# Altium PCB PCB_new.PcbDoc (part 1 of 2)
Units mm, origin at the board's own origin, x right, y up, seen from the top; angles counter-clockwise.
Board outline 65.13 x 92.71 mm, 2 copper layers (Top Layer, Bottom Layer); 63 components, 54 nets, 264 pads, 73 vias.
Unrouted connection lines stored in the file: 34.
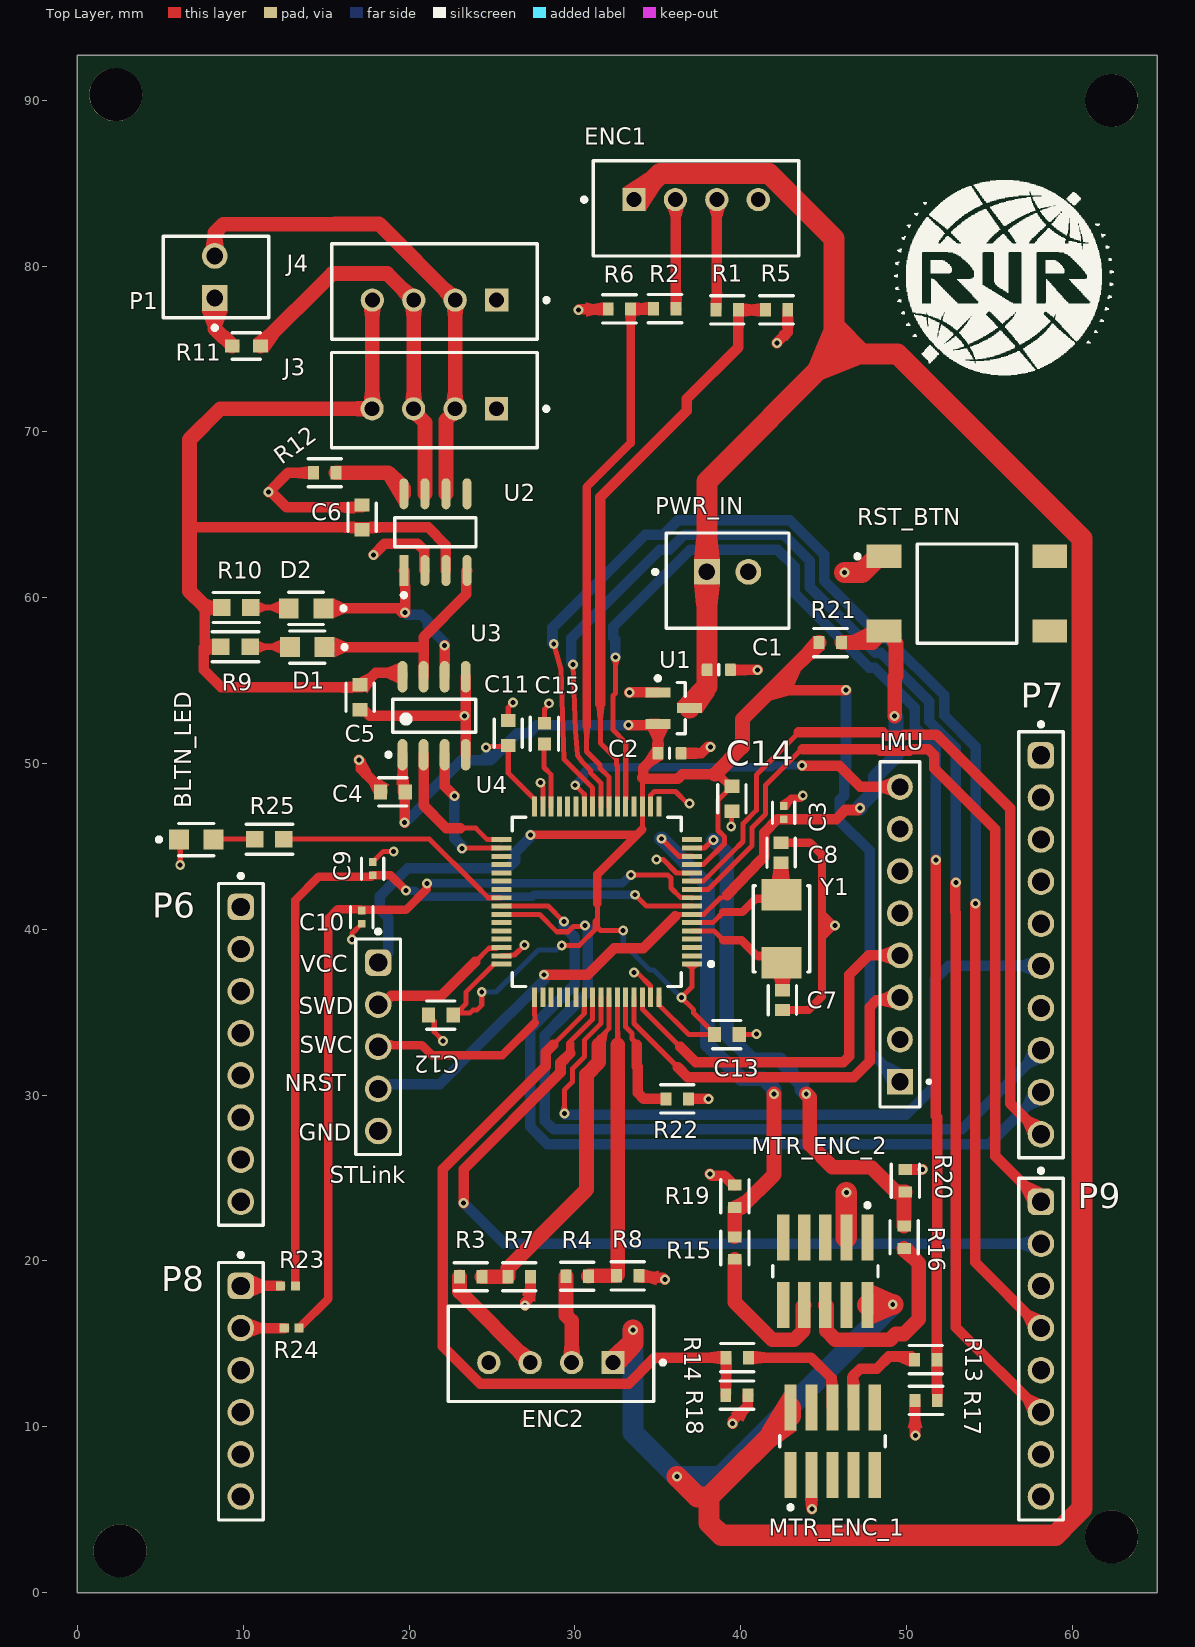
[diagram p0: Top Layer view]
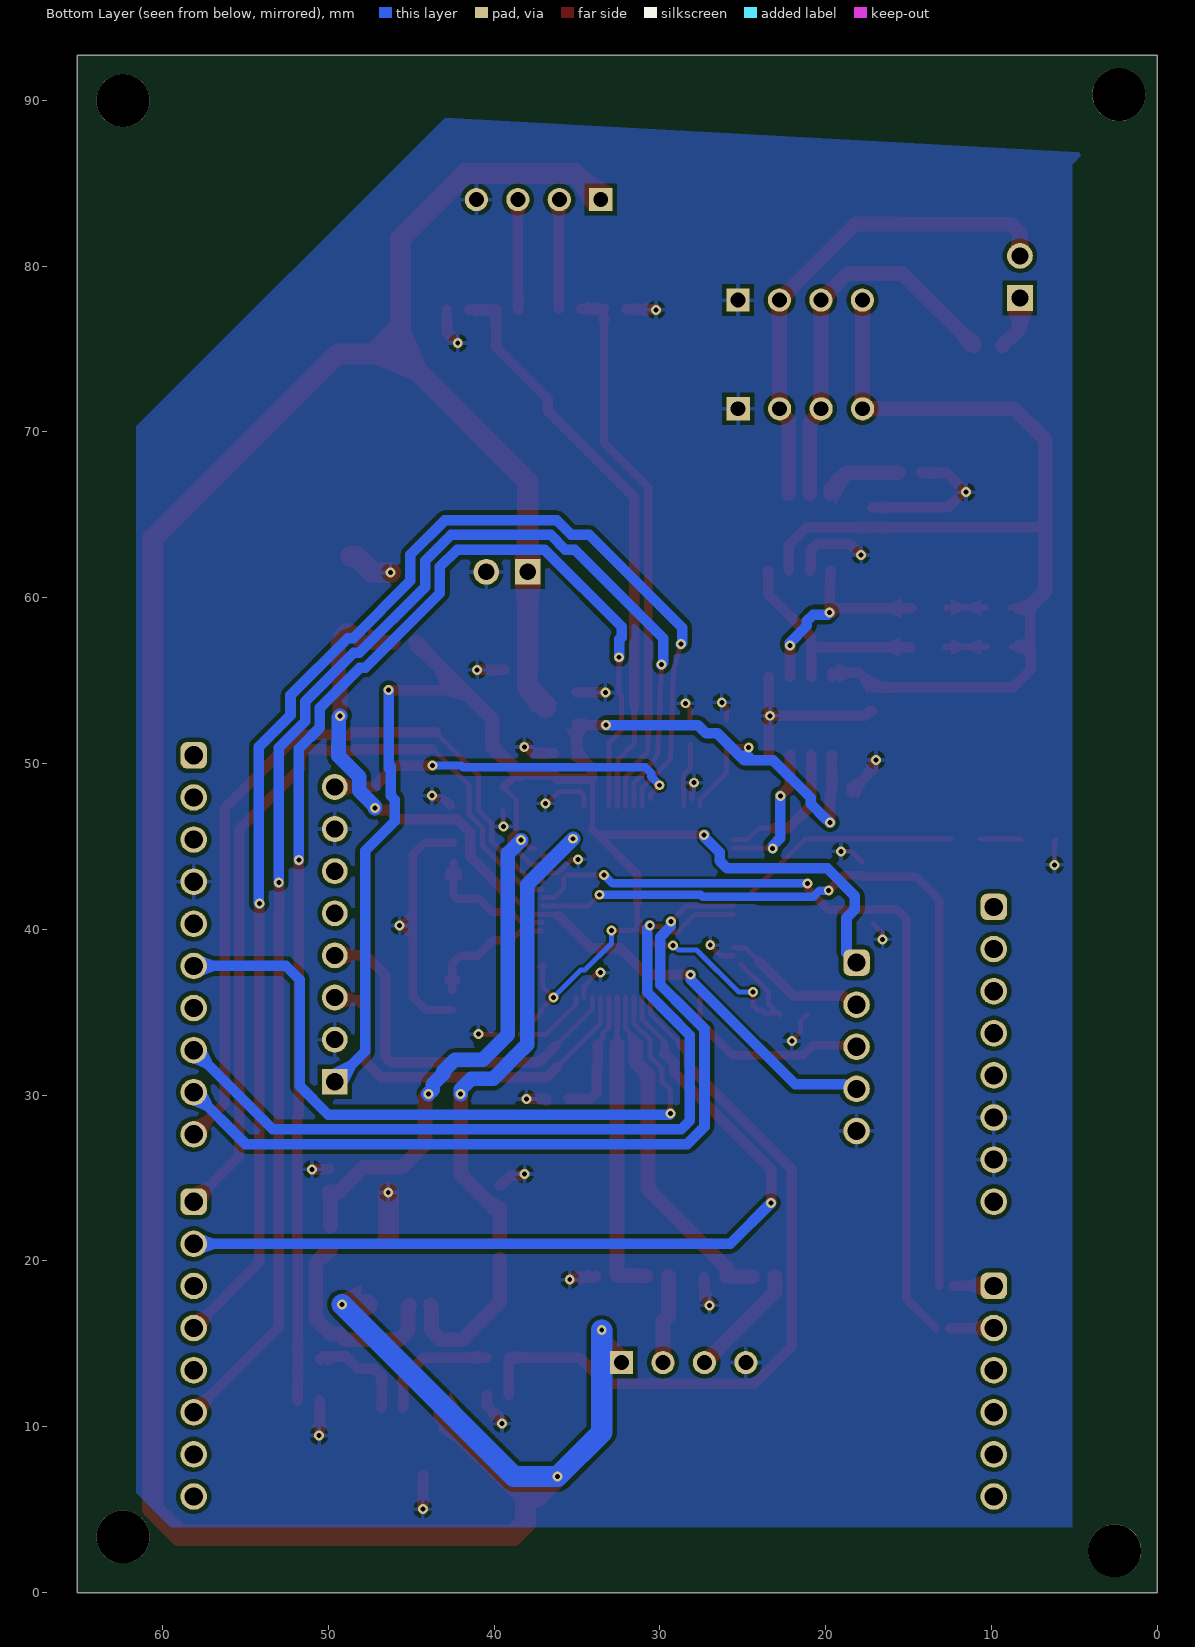
[diagram p1: Bottom Layer view, seen from below]
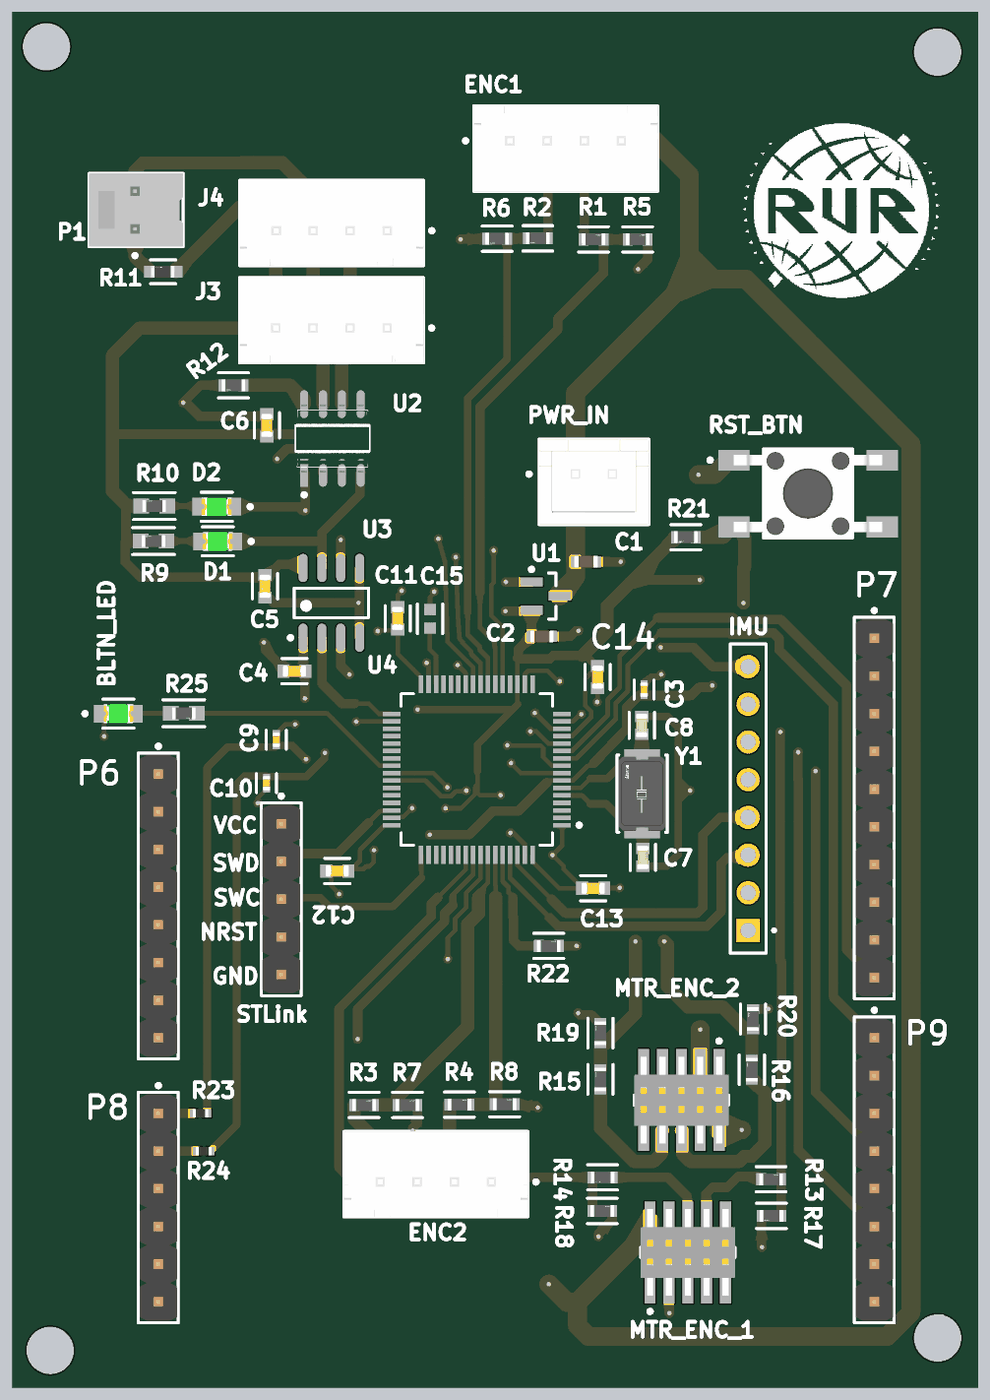
[diagram p2: 3D render of the assembled board from above, using the file's embedded part models]

## Layer stack, top to bottom
Top Solder: solder mask 0.0102, Solder Resist, Dk 3.5
Top Layer: signal copper 0.0356
Dielectric 1: dielectric 0.32, FR-4, Dk 4.8
Bottom Layer: signal copper 0.0356
Bottom Solder: solder mask 0.0102, Solder Resist, Dk 3.5

## Board outline
0,0 65.126,0 65.126,92.71 0,92.71

## Design rules (kind name [scope] priority, off if disabled: settings)
Clearance ClearanceChip [All vs WithinRoom('ChipRegion')] p1: gap=0.152 ignorepadtopadclearanceinfootprint=TRUE
Clearance Clearance_1 [All] p2: gap=0.254 ignorepadtopadclearanceinfootprint=TRUE
HoleSize [All] p1: absolutevalues=TRUE maxlimit=25.4 minlimit=0.3 maxpercent=80.000 minpercent=20.000
MinimumSolderMaskSliver [All] p1: minsoldermaskwidth=0.127
PolygonConnect [All] p1: connectstyle=Relief reliefconductorwidth=0.254 reliefentries=4 polygonreliefangle="90 Angle" airgapwidth=0.254
RoomDefinition ChipRegion [False] p1: confinementstyle=ConfineIn formatcopy=TRUE lockcomponents=FALSE outline 23.317,49.936 39.091,49.936 39.091,32.36 23.317,32.36
RoutingVias [All] p1: holewidth=0.3 width=0.5 viastyle="Through Hole" minholewidth=0.3 minwidth=0.6 maxholewidth=1 maxwidth=2
SolderMaskExpansion [All] p1: expansion=0.102 istentingtop=FALSE
SupplyNets "Schematic Supply Nets_7" [InNet('GND')] p1: voltage=0.000
SupplyNets "Schematic Supply Nets_6" [InNet('VCC-3V3')] p2: voltage=0.000
SupplyNets "Schematic Supply Nets_5" [InNet('CAN_TX')] p3: voltage=0.000
SupplyNets "Schematic Supply Nets_4" [InNet('CAN-3V3')] p4: voltage=0.000
SupplyNets "Schematic Supply Nets_3" [InNet('VCC-5V')] p5: voltage=0.000
SupplyNets "Schematic Supply Nets_2" [InNet('OSC2')] p6: voltage=0.000
SupplyNets "Schematic Supply Nets_1" [InNet('CAN_RX')] p7: voltage=0.000
SupplyNets "Schematic Supply Nets" [InNet('OSC1')] p8: voltage=0.000
Width [All] p1: maxlimit=2.54 minlimit=0.254 preferedwidth=0.508
28 further rules are at their usual default settings.

## Classes and differential pairs
component class VoltageRegulator_3v3: C1 C2 U1
component class STM32: BLTN_LED C3 C11 C12 C13 C14 C15 R21 R22 R25 RST_BTN U4
component class STLink: STLink
component class Power: PWR_IN
component class Oscilator: C7 C8 Y1
component class OdomEncoders: ENC1 ENC2 R1 R2 R3 R4 R5 R6 R7 R8
component class MotorShield: C9 C10 P6 P7 P8 P9 R23 R24
component class MotorEncoders: MTR_ENC_1 MTR_ENC_2 R13 R14 R15 R16 R17 R18 R19 R20
component class IMU: IMU
component class Communication: C4 C5 C6 D1 D2 J3 J4 P1 R9 R10 R11 R12 U2 U3

## Components (designator, comment, footprint, x,y, rotation, side; value= is the part's Value field where it differs from the comment)
BLTN_LED "APHCM2012CGCK-F01" FP-APHCM2012CGCK-F01-MFG 7.163,45.415 r0 top
C1 "Capacitor 1µF +/-40% 50V 0603" CAPC0603(1608)100_L 38.684,55.651 r0 top value=1µF
C2 "Capacitor 1µF +/-40% 50V 0603" CAPC0603(1608)100_L 35.712,50.622 r0 top value=1µF
C3 "100nF" FP-0402B104K160CT-IPC_C 42.596,47.041 r90 top
C4 "CC0603KRX7R9BB104" FP-CC0603-DA-MFG 19.025,48.285 r180 top value="100 nF"
C5 "CC0603KRX7R9BB104" FP-CC0603-DA-MFG 17.043,54 r270 top value="100 nF"
C6 "CC0603KRX7R9BB104" FP-CC0603-DA-MFG 17.17,64.846 r90 top value="100 nF"
C7 "C0603C270K5GAC" FP-C0603C-CF-MFG 42.52,35.738 r270 top value="27 pF"
C8 "C0603C270K5GAC" FP-C0603C-CF-MFG 42.443,44.628 r90 top value="27 pF"
C9 "100nF" FP-0402B104K160CT-IPC_C 17.805,43.663 r270 top
C10 "100nF" FP-0402B104K160CT-IPC_C 17.145,40.738 r270 top
C11 "CC0603KRX7R9BB104" FP-CC0603-DA-MFG 25.984,51.841 r270 top value="100 nF"
C12 "CC0603KRX7R9BB104" FP-CC0603-DA-MFG 21.92,34.823 r180 top value="100 nF"
C13 "CC0603KRX7R9BB104" FP-CC0603-DA-MFG 39.167,33.655 r180 top value="100 nF"
C14 "CC0603KRX7R9BB104" FP-CC0603-DA-MFG 39.472,47.879 r270 top value="100 nF"
C15 "CL10A475KP8NNNC" FP-CL10-IPC_C 28.169,51.808 r90 top
D1 "APHCM2012CGCK-F01" FP-APHCM2012CGCK-F01-MFG 13.86,57.023 r180 top
D2 "APHCM2012CGCK-F01" FP-APHCM2012CGCK-F01-MFG 13.792,59.36 r180 top
ENC1 "B4B-XH-A(LF)(SN)" FP-B4B-XH-A_LF_SN-MFG 37.313,83.49 r180 top
ENC2 "B4B-XH-A(LF)(SN)" FP-B4B-XH-A_LF_SN-MFG 28.559,14.393 r0 top
IMU "SSW-108-XX-X-S" SAMTEC_SSW-108-XX-X-S 49.606,30.81 r90 top
J3 "B4B-XH-A(LF)(SN)" FP-B4B-XH-A_LF_SN-MFG 21.523,71.924 r0 top
J4 "B4B-XH-A(LF)(SN)" FP-B4B-XH-A_LF_SN-MFG 21.534,78.478 r0 top
MTR_ENC_1 "FTSH-105-01-L-DV" SMTC-FTSH-105-01-L-DV_V 45.542,9.119 r0 top
MTR_ENC_2 "FTSH-105-01-L-DV" SMTC-FTSH-105-01-L-DV_V 45.11,19.38 r180 top
P1 "22-23-2021" MOLX-22-23-2021_V 8.28,79.35 r90 top
P6 "61300811121" 61300811121 9.855,32.461 r270 top
P7 "61301011121" 61301011121 58.115,39.065 r270 top locked
P8 "61300611121" 61300611121 9.855,12.141 r270 top locked
P9 "61300811121" 61300811121 58.115,14.681 r270 top locked
PWR_IN "B2B-XH-A(LF)(SN)" FP-B2B-XH-A_LF_SN-MFG 39.218,61.036 r0 top
R1 "10K" FP-RC0603-0_55-IPC_C 39.192,77.368 r0 top
R2 "10K" FP-RC0603-0_55-IPC_C 35.433,77.445 r180 top
R3 "10K" FP-RC0603-0_55-IPC_C 23.724,19.05 r0 top
R4 "10K" FP-RC0603-0_55-IPC_C 30.15,19.075 r0 top
R5 "20K" FP-RC0603-0_55-IPC_C 42.164,77.368 r0 top
R6 "20K" FP-RC0603-0_55-IPC_C 32.69,77.419 r180 top
R7 "20K" FP-RC0603-0_55-IPC_C 26.645,19.05 r0 top
R8 "20K" FP-RC0603-0_55-IPC_C 33.198,19.101 r0 top
R9 "AC0603FR-10470RL" FP-AC0603-IPC_A 9.531,57.048 r180 top
R10 "AC0603FR-10470RL" FP-AC0603-IPC_A 9.576,59.411 r180 top
R11 "RT0603FRE07120RL" FP-RT0603-MFG 10.185,75.184 r180 top value=120Ω
R12 "10K" FP-RC0603-0_55-IPC_C 14.919,67.539 r180 top
R13 "10K" FP-RC0603-0_55-IPC_C 51.156,14.046 r0 top
R14 "10K" FP-RC0603-0_55-IPC_C 39.802,14.173 r180 top
R15 "10K" FP-RC0603-0_55-IPC_C 39.649,20.777 r90 top
R16 "10K" FP-RC0603-0_55-IPC_C 49.86,21.429 r90 top
R17 "20K" FP-RC0603-0_55-IPC_C 51.181,11.582 r180 top
R18 "20K" FP-RC0603-0_55-IPC_C 39.776,11.913 r0 top
R19 "20K" FP-RC0603-0_55-IPC_C 39.649,23.892 r90 top
R20 "20K" FP-RC0603-0_55-IPC_C 49.936,24.841 r90 top
R21 "10k" FP-RC0603-0_55-IPC_C 45.415,57.302 r180 top
R22 "10k" FP-RC0603-0_55-IPC_C 36.17,29.769 r0 top
R23 "1k" RESC1005X40X25NL05T05 12.693,18.491 r180 top
R24 "1k" RESC1005X40X25NL05T05 12.921,15.951 r180 top
R25 "AC0603FR-10470RL" FP-AC0603-IPC_A 11.569,45.441 r0 top
RST_BTN "1301.9316.24" FP-1301_9316_24-MFG 53.645,60.249 r0 top
STLink "61300511121" 61300511121 18.136,32.918 r270 top
U1 "MCP1700T-3302E/TT" SOT-23-TT3_N 35.956,53.34 r0 top
U2 "SN65HVD230QDR" FP-D0008A-IPC_C 21.59,63.957 r90 top
U3 "ADUM1201BRZ-RL7" ADI-R-8_L 21.514,52.883 r90 top
U4 "STM32F446RET6" FP-LQFP64-5W-MFG 31.318,41.656 r180 top
Y1 "ABM3-8.000MHZ-D2Y-T" FP-ABM3-MFG 42.469,40.03 r90 top

## Footprints (in the part's own frame and the unit in brackets; to place one, negate y for a bottom-side part, rotate by r counter-clockwise, add the part's x,y. Pads: shape width x height; smd on the part's side, far side on the other; paste and mask are expansions set on the pad)
61300511121 [mm] "Pin Header, pitch 2.54 mm, THT, Vertical, single row, 5p"
  rrect50% 1.6x1.6 hole 1.1: 1(-5.08,0)
  round 1.6 hole 1.1: 2(-2.54,0) 3(0,0) 4(2.54,0) 5(5.08,0)
  silkscreen extent -7.07,-1.34 6.5,1.34, body extent -6.35,-1.27 6.35,1.27, height 8.57
61300611121 [mm] "Pin Header, pitch 2.54 mm, THT, Vertical, single row, 6p"
  rrect50% 1.6x1.6 hole 1.1: 1(-6.35,0)
  round 1.6 hole 1.1: 2(-3.81,0) 3(-1.27,0) 4(1.27,0) 5(3.81,0) 6(6.35,0)
  silkscreen extent -8.34,-1.34 7.77,1.34, body extent -7.62,-1.27 7.62,1.27, height 8.57
61300811121 [mm] "Pin Header, pitch 2.54 mm, THT, Vertical, single row, 8p"
  rrect50% 1.6x1.6 hole 1.1: 1(-8.89,0)
  round 1.6 hole 1.1: 2(-6.35,0) 3(-3.81,0) 4(-1.27,0) 5(1.27,0) 6(3.81,0) 7(6.35,0) 8(8.89,0)
  silkscreen extent -10.88,-1.34 10.31,1.34, body extent -10.16,-1.27 10.16,1.27, height 8.57
61301011121 [mm] "Pin Header, pitch 2.54 mm, THT, Vertical, single row, 10p"
  rrect50% 1.6x1.6 hole 1.1: 1(-11.43,0)
  round 1.6 hole 1.1: 2(-8.89,0) 3(-6.35,0) 4(-3.81,0) 5(-1.27,0) 6(1.27,0) 7(3.81,0) 8(6.35,0) 9(8.89,0) 10(11.43,0)
  silkscreen extent -13.42,-1.34 12.85,1.34, body extent -12.7,-1.27 12.7,1.27, height 8.57
ADI-R-8_L [mm] "SOIC, 8-Leads, Body 4.9x3.9mm, Pitch 1.27mm, IPC High Density"
  oval 1.9x0.6 smd: 1(-2.35,1.905) 2(-2.35,0.635) 3(-2.35,-0.635) 4(-2.35,-1.905) 5(2.35,-1.905) 6(2.35,-0.635) 7(2.35,0.635) 8(2.35,1.905)
  silkscreen extent -2.47,-2.5 1,2.88, body extent -2,-2.5 2,2.5, height 1.75
CAPC0603(1608)100_L [mm] "Chip Capacitor, Body 1.6x0.8mm, Height 1.0mm, IPC High Density"
  rrect25% 0.66x0.76 smd: 1(-0.7,0) 2(0.7,0)
  silkscreen extent 0,-0.3 0,0.3, body extent -0.8,-0.4 0.8,0.4, height 0.95
FP-0402B104K160CT-IPC_C [mm]
  rect 0.466x0.472 smd paste+0 mask+0: 1(-0.403,0) 2(0.403,0)
  silkscreen extent -0.64,-0.67 0.64,0.67, body extent -0.74,-0.38 0.74,0.38, height 0.25
FP-1301_9316_24-MFG [mm]
  rect 2.1x1.4 smd paste+0 mask+0: 1(-5,2.25) 2(5,2.25) 3(-5,-2.25) 4(5,-2.25)
  silkscreen extent -6.72,-3 3,3, body extent -6.15,-3.1 6.15,3.1, height 0.25
FP-ABM3-MFG [mm]
  rect 1.9x2.4 smd paste+0 mask+0: 1(-2.05,0) 2(2.05,0)
  silkscreen extent -2.6,-1.7 2.6,1.7, body extent -3.1,-1.8 3.1,1.8, height 0.25
FP-AC0603-IPC_A [mm]
  rect 1.059x1.012 smd paste+0 mask+0: 1(-0.877,0) 2(0.877,0)
  silkscreen extent -1.41,-0.91 1.41,0.91, body extent -1.91,-1.01 1.91,1.01, height 0.25
FP-APHCM2012CGCK-F01-MFG [mm]
  rect 1.2x1.2 smd paste+0 mask+0: 1(-1.05,0) 2(1.05,0)
  silkscreen extent -2.37,-0.97 1.05,0.97, body extent -1.75,-0.77 1.75,0.77, height 0.25
FP-B2B-XH-A_LF_SN-MFG [mm]
  rect 1.55x1.55 hole 1 paste-2539.97 mask+0: 1(-1.25,0.525)
  round 1.55 hole 1 paste-2539.97 mask+0: 2(1.25,0.525)
  silkscreen extent -4.5,-2.87 3.7,2.88, body extent -3.8,-2.98 3.8,2.98, height 0.25
FP-B4B-XH-A_LF_SN-MFG [mm]
  rect 1.4x1.4 hole 0.9 paste-2539.97 mask+0: 1(3.75,-0.525)
  round 1.4 hole 0.9 paste-2539.97 mask+0: 2(1.25,-0.525) 3(-1.25,-0.525) 4(-3.75,-0.525)
  silkscreen extent -6.2,-2.88 6.87,2.87, body extent -6.3,-2.98 6.3,2.98, height 0.25
FP-C0603C-CF-MFG [mm]
  rect 0.75x0.9 smd paste+0 mask+0: 1(-0.6,0) 2(0.6,0)
  silkscreen extent -0.87,-0.85 0.88,0.85, body extent -1.2,-0.6 1.2,0.6, height 0.25
FP-CC0603-DA-MFG [mm]
  rect 0.8x0.9 smd paste+0 mask+0: 1(-0.75,0) 2(0.75,0)
  silkscreen extent -0.85,-0.85 0.85,0.85, body extent -1.35,-0.75 1.35,0.75, height 0.25
FP-CL10-IPC_C [mm]
  rect 0.758x0.812 smd paste+0 mask+0: 1(-0.627,0) 2(0.627,0)
  silkscreen extent -1.01,-0.85 1.01,0.85, body extent -1.11,-0.55 1.11,0.55, height 0.25
FP-D0008A-IPC_C [mm]
  rect 1.869x0.542 smd paste+0 mask+0: 1(-2.314,1.905)
  rrect100% 1.869x0.542 smd paste+0 mask+0: 2(-2.314,0.635) 3(-2.314,-0.635) 4(-2.314,-1.905) 5(2.314,-1.905) 6(2.314,-0.635) 7(2.314,0.635) 8(2.314,1.905)
  silkscreen extent -3.92,-2.45 0.88,2.45, body extent -3.35,-2.55 3.35,2.55, height 0.25
FP-LQFP64-5W-MFG [mm]
  rect 1.2x0.3 smd paste+0 mask+0: 1(-5.75,3.75) 2(-5.75,3.25) 3(-5.75,2.75) 4(-5.75,2.25) 5(-5.75,1.75) 6(-5.75,1.25) 7(-5.75,0.75) 8(-5.75,0.25) 9(-5.75,-0.25) 10(-5.75,-0.75) 11(-5.75,-1.25) 12(-5.75,-1.75) 13(-5.75,-2.25) 14(-5.75,-2.75) 15(-5.75,-3.25) 16(-5.75,-3.75) 33(5.75,-3.75) 34(5.75,-3.25) 35(5.75,-2.75) 36(5.75,-2.25) 37(5.75,-1.75) 38(5.75,-1.25) 39(5.75,-0.75) 40(5.75,-0.25) 41(5.75,0.25) 42(5.75,0.75) 43(5.75,1.25) 44(5.75,1.75) 45(5.75,2.25) 46(5.75,2.75) 47(5.75,3.25) 48(5.75,3.75)
  rect 0.3x1.2 smd paste+0 mask+0: 17(-3.75,-5.75) 18(-3.25,-5.75) 19(-2.75,-5.75) 20(-2.25,-5.75) 21(-1.75,-5.75) 22(-1.25,-5.75) 23(-0.75,-5.75) 24(-0.25,-5.75) 25(0.25,-5.75) 26(0.75,-5.75) 27(1.25,-5.75) 28(1.75,-5.75) 29(2.25,-5.75) 30(2.75,-5.75) 31(3.25,-5.75) 32(3.75,-5.75) 49(3.75,5.75) 50(3.25,5.75) 51(2.75,5.75) 52(2.25,5.75) 53(1.75,5.75) 54(1.25,5.75) 55(0.75,5.75) 56(0.25,5.75) 57(-0.25,5.75) 58(-0.75,5.75) 59(-1.25,5.75) 60(-1.75,5.75) 61(-2.25,5.75) 62(-2.75,5.75) 63(-3.25,5.75) 64(-3.75,5.75)
  silkscreen extent -7.02,-5.1 5.1,5.1
FP-RC0603-0_55-IPC_C [mm]
  rect 0.659x0.812 smd paste+0 mask+0: 1(-0.677,0) 2(0.677,0)
  silkscreen extent -1.01,-0.85 1.01,0.85, body extent -1.11,-0.55 1.11,0.55, height 0.25
FP-RT0603-MFG [mm]
  rect 0.9x0.8 smd paste+0 mask+0: 1(-0.85,0) 2(0.85,0)
  silkscreen extent -0.85,-0.81 0.86,0.8, body extent -1.4,-0.55 1.4,0.55, height 0.25
MOLX-22-23-2021_V [mm] "THD, 2-Leads, Body 6.35x4.93mm, Pitch 2.54mm"
  rect 1.55x1.55 hole 1.02: 1(-1.27,0)
  round 1.55 hole 1.02: 2(1.27,0)
  silkscreen extent -3.19,-3.25 2.47,3.1, body extent -2.46,-3.25 2.46,3.1, height 10.66
RESC1005X40X25NL05T05 [mm] "Chip Resistor, 2-Leads, Body 1.05x0.55mm, IPC Medium Density"
  rect 0.55x0.55 smd: 1(-0.45,0) 2(0.45,0)
  body extent -0.53,-0.28 0.53,0.28, height 0.4
SAMTEC_SSW-108-XX-X-S [mm]
  rect 1.56x1.56 / inner round 1.56 / far side rect 1.56x1.56 hole 1.04: 01(0,0)
  round 1.56 hole 1.04: 02(2.54,0) 03(5.08,0) 04(7.62,0) 05(10.16,0) 06(12.7,0) 07(15.24,0) 08(17.78,0)
  silkscreen extent -1.53,-1.85 19.31,1.2
SMTC-FTSH-105-01-L-DV_V [mm] "CONN, 10-Leads, Body 6.35x3.43mm, Pitch 1.27mm"
  rect 0.74x2.79 smd: 1(-2.54,-2.035) 2(-2.54,2.035) 3(-1.27,-2.035) 4(-1.27,2.035) 5(0,-2.035) 6(0,2.035) 7(1.27,-2.035) 8(1.27,2.035) 9(2.54,-2.035) 10(2.54,2.035)
  silkscreen extent -3.17,-4.1 3.17,0.34, body extent -3.17,-2.92 3.18,2.92, height 5.96
SOT-23-TT3_N [mm] "SOT23, 3-Leads, Body 2.9x1.3mm, Pitch 0.95mm, Lead Span 2.4mm, IPC Medium Density"
  rect 1.5x0.6 smd: 1(-0.95,0.95) 2(-0.95,-0.95) 3(0.95,0)
  silkscreen extent -1.07,-1.55 0.7,1.92, body extent -0.7,-1.52 0.7,1.53, height 1.12

## Part data
BLTN_LED D1 D2: library part CMP-44529-000062-1, "LED GREEN CLEAR CHIP SMD", Case Code (Imperial)=0805, Case Code (Metric)=2012, Color=Green, Forward Current=20mA, Forward Voltage=2.1V, Lens Color=Clear, Max Operating Temperature=85°C, Min Operating Temperature=-40°C, Package Quantity=1, Case/Package=0805, Dominant Wavelength=570nm, Height=0.4mm, Illumination Color=Green, Lead Free="Lead Free", Length=2mm, Lens Style=Clear, Luminous Intensity=40mcd, Mount="Surface Mount", Number of LEDs=1, Number of Pins=2, Packaging="Tape and Reel", RoHS Compliant=Yes, Series=APHCM, Test Current=20mA, Viewing Angle=110°, Wavelength=570nm, Width=1.25mm
C1 C2: library part CMP-001-00078-4, "Chip Capacitor, 1µF +/-40%, 50V, 0603, Thickness 1 mm", Case/Package=0603, Max Operating Temperature=85°C, Min Operating Temperature=-55°C, Tolerance=10%, Voltage Rating=50V, Mounting Technology=SMT, Pins=2
C3 C9 C10: library part CMP-45632-000002-1, "CAP CER 0.1UF 16V X7R 0402", Case Code (Imperial)=0402, Case Code (Metric)=1005, Dielectric=X7R, Max Operating Temperature=125°C, Min Operating Temperature=-55°C, Tolerance=10%, Voltage Rating=16V, Capacitance=100nF, Case/Package=0402, Depth=0.5mm, Lead Free="Lead Free", Length=1mm, Packaging="Tape and Reel", Radiation Hardening=No, RoHS Compliant=Yes, Series=-, Voltage Rating (DC)=16V
C4 C5 C6 C11 C12 C13 C14: library part CMP-2100-03601-2, "CAP CER 0.1UF 50V X7R 0603", Capacitance="100 nF", Manufacturer=YAGEO, Package=CC0603-DA, Temperature="-55°C to +125°C", Temperature Characteristic=X7R, Temperature Coefficient=15%, Temperature Range High=+125°C, Temperature Range Low=-55°C, Tolerance=0.1, Voltage="50 V", Automotive=No, Category=Cap, ComponentLink2Description=Datasheet, ComponentLink2URL=http://www.yageo.com/documents/recent/UPY-GPHC_X7R_6.3V-to-50V_18.pdf, Device Class L1="Passive Components", Device Class L2=Capacitors, Device Class L3="Ceramic Capacitors", Digikey Description="CAP CER 0.1UF 50V X7R 0603", Footprint Url=http://www.yageo.com/exep/pages/download/literatures/UPY-C_GEN_24.pdf, Height=0.9mm, Lead Free=Yes, Manufacturer Part Number=CC0603KRX7R9BB104, Material=Ceramic, Mouser Description="Multilayer Ceramic Capacitor, CC Series, 0.1 - F, - 10%, X7R, 50 V, 0603 [1608 Metric]", Octopart=https://octopart.com/cc0603krx7r9bb104-yageo-42244635, RoHS=TRUE, Voltage Rating="50 V"
C7 C8: library part CMP-03020-019774-1, "C0603 27 pF C0G 30ppm/°C 10.00% 50 V", Capacitance="27 pF", Manufacturer=KEMET, Package=C0603C-CF, Temperature="-55°C to +125°C", Temperature Characteristic=C0G, Temperature Coefficient=30ppm/°C, Temperature Range High=+125°C, Temperature Range Low=-55°C, Tolerance=0.1, Voltage Rating="50 V", Automotive=Yes, Automotive Grade="Grade 1", Category=Cap, ComponentLink2Description=Datasheet, ComponentLink2URL=https://api.kemet.com/component-edge/download/datasheet/C0603C100J5GACAUTO.pdf, Device Class L1="Passive Components", Device Class L2=Capacitors, Device Class L3="Ceramic Capacitors", Height=0.87mm, Lead Free=Yes, Manufacturer Part Number=C0603C270K5GAC, Material=Ceramic, Mouser Description="Multilayer Ceramic Capacitors MLCC - SMD/SMT 50volts 27pF 10% C0G", Octopart=https://octopart.com/c0603c270k5gac-kemet-8089732, RoHS=TRUE
C15: library part CMP-13271-003017-1, "Cap Ceramic 4.7uF 10V X5R ±10% Pad SMD 0603 +85°C T/R", Capacitance=4.7uF, Case Code (Imperial)=0603, Case Code (Metric)=1608, Dielectric=X5R, Max Operating Temperature=85°C, Min Operating Temperature=-55°C, Package Quantity=1, Tolerance=10%, Voltage Rating=10V, Case/Package=0603, Contact Plating=Tin, Depth=0.8mm, Height=0.8mm, Length=1.6mm, Mount="Surface Mount", Packaging="Tape and Reel", Radiation Hardening=No, Thickness=0.035inch, Width=0.031inch
ENC1 ENC2 J3 J4: library part CMP-17439-000250-1, "CONN HEADER VERT 4POS 2.5MM", Color=Natural, Contact Resistance=20mR, Current Rating=3A, Flammability Rating="UL94 V-0", Housing Color=White, Insulation Resistance=1GR, Max Operating Temperature=85°C, Max Voltage Rating (AC)=250V, Min Operating Temperature=-25°C, Package Quantity=500, Connector Type=Header, Contact Finish - Mating=TIN, Contact Material=Brass, Contact Plating=Tin, Contact Shape=Square, Contact Type="Male Pin", Depth=5.75mm, Fastening Type=Detent, Gender=Male, Housing Material=Polyamide, Insulation Color=Natural, Insulation Material=Nylon, Lead Free="Lead Free", Lead Pitch=2.5mm, Length=12.4mm, Mated Stacking Heights=9.8mm, Material=Polyamide, Max Current Rating=3A, Max Voltage Rating (DC)=250V, Mount="Through Hole", Number of Contacts=4, Number of Positions=4, Number of Rows=1, Orientation=Straight, Packaging=Bulk, Pitch=2.5mm, REACH SVHC="No SVHC", Series=XH, Termination=Solder, Voltage Rating=250V, Voltage Rating (AC)=250V, Wire/Cable Gauge=22AWG
IMU: "8 Position Receptacle Connector 0.100 (2.54mm) Through Hole, Right Angle Gold", Package=None, Check_prices=https://www.snapeda.com/parts/SSW-108-23-G-S/Samtec/view-part/?ref=eda, MF=Samtec, MP=SSW-108-23-G-S, SnapEDA_Link=https://www.snapeda.com/parts/SSW-108-23-G-S/Samtec/view-part/?ref=snap
MTR_ENC_1 MTR_ENC_2: library part CMP-2000-05354-1, "Male Header, Pitch 1.27 mm, 2 x 5 Position, Height 5.96 mm, -55 to 125 degC, RoHS, Bulk", Color=Black, Manufacturer=Samtec, Standard Package=1, Catalog Drawings=FTSHSeriesFTSHSeriesSMTSide, Category=Connectors,Interconnects, Connector Type=Header,Unshrouded, Contact Finish=Gold, Contact Finish Thickness=10µin(0.25µm), Contact Mating Length="0.120\"(3.05mm)", Contact Type=MalePin, Datasheet URL=https://datasheet.ciiva.com/30493/0900766b80adfe36-30493006.pdf, Datasheet Version=Feb-08, EDA / CAD Models=DownloadfromAcceleratedDesigns, Family=RectangularConnectors-Headers,MalePins, Fastening Type=-, Featured Product=Board-To-BoardInterconnectSystems, Features=-, Manufacturer URL=http://www.samtec.com/, Mating Products="FLE-105-01-G-DV-TR-ND-CONNSKT1.27MM10POSDUALSMDCLP-105-02-G-D-P-TR-ND-CONNRCPT10POSDUAL.05\"SMDSFMC-105-L2-S-D-TR-ND-CONN.05\"SURFACE10POSSMTSFMH-105-02-L-D-TR-ND-CONNRECEPT10POS.50\"SMTFLE-105-01-G-DV-A-ND-CONNSKT1.27MM10POSDUALSMDCLP-105-02-G-D-BE-ND-CONNRCPT10POSDUAL.05\"SMDFLE-105-01-G-DV-A-P-ND-CONNSKT1.27MM10POSDUALSMDSAM1153-05-ND-CONNRCPT10POSDUAL.05\"SMDSAM1155-05-ND-CONNRCPT10POSDUAL.05\"SMDSAM1154-05-ND-CONNRCPT10POSDUAL.05\"SMDSFMH-105-02-L-D-LC-ND-CONNRECEPT10POS.50\"SMTSAM1226-05-ND-CONNRCPT.05\"10POSDUALSMD", Mounting Type=SurfaceMount, Number of Positions=10, Number of Positions Loaded=All, Number of Rows=2, Online Catalog=FTSHSeries, Other Names=SAM1161-05, Packaging=Bulk, Pitch="0.050\"(1.27mm)", Product Training Modules=Board-to-BoardConnectors, Row Spacing="0.050\"(1.27mm)", Series=FTSH, Termination=Solder
P1: library part CMP-1704-00001-3, "Male Header, Pitch 2.54 mm, 1 x 2 Position, Height 10.67 mm, Tail Length 3.56 mm, 0 to 75 degC, RoHS, Bulk", Max Operating Temperature="75 degC", Min Operating Temperature="0 degC", Package Quantity=3000, ComponentLink1Description="Manufacturer URL", ComponentLink1URL=http://www.molex.com/, ComponentLink2Description=Datasheet, ComponentLink2URL=https://datasheet.ciiva.com/19454/232266-19454304.pdf, Height="10.67 mm", Length="5.08 mm", Mount="Through Hole", Mounting Technology="Through Hole", PackageDescription="Male Header, Pitch 2.54 mm, 1 x 2 Position, Height 10.67 mm, Tail Length 3.56 mm", Packaging=Bulk, PartNumber=22-23-2021, Pins=2, Radiation Hardening=No, REACH SVHC=Unknown, RoHSCompliant=True, Width="6.35 mm"
P6 P9: library part CMP-1502-01076-4, "THT Vertical Pin Header WR-PHD, Pitch 2.54 mm, Single Row, 8 pins", Color=Black, Contact Resistance=20mΩ, Current Rating=3A, Max Operating Temperature=105°C, Min Operating Temperature=-40°C, Operating Supply Voltage=250V, Connector Type="Male Pin", Contact Material=Gold, Contact Mating Length=5.9944mm, Contact Plating=Gold, Gender=Male, Height=8.54mm, Lead Pitch=2.54mm, Mount="Through Hole", Number of Contacts=8, Number of Pins=8, Number of Positions=8, Number of Rows=1, Orientation=Vertical, Packaging=Bulk, Pitch=2.54mm, RoHS=Compliant, Termination=Solder, Voltage Rating=250V
P7: library part CMP-1502-01082-6, "THT Vertical Pin Header WR-PHD, Pitch 2.54 mm, Single Row, 10 pins", Color=Black, Contact Resistance=20mΩ, Current Rating=3A, Flammability Rating="UL94 V-0", Insulation Resistance=1GΩ, Max Operating Temperature=105°C, Min Operating Temperature=-40°C, Operating Supply Voltage=250V, Connector Type="Male Pin", Contact Gender=Male, Contact Material=Gold, Contact Mating Length=5.9944mm, Contact Plating=Gold, Gender=Male, Height=8.74mm, Housing Material=PBT, Lead Pitch=2.54mm, Length=2.54mm, Mount="Through Hole", Number of Contacts=10, Number of Pins=10, Number of Positions=10, Number of Rows=1, Orientation=Vertical, Packaging=Bulk, Pitch=2.54mm, RoHS=Compliant, Termination=Solder, Voltage Rating=250V, Width=25.4mm
P8: library part CMP-1502-01070-4, "THT Vertical Pin Header WR-PHD, Pitch 2.54 mm, Single Row, 6 pins", Color=Black, Contact Resistance=20mΩ, Current Rating=3A, Max Operating Temperature=105°C, Min Operating Temperature=-40°C, Operating Supply Voltage=250V, Connector Type="Male Pin", Contact Gender=Male, Contact Material=Gold, Contact Mating Length=5.9944mm, Contact Plating=Gold, Gender=Male, Height=8.89mm, Housing Material=PBT, Lead Free="Lead Free", Lead Pitch=2.54mm, Mount="Through Hole", Number of Contacts=6, Number of Pins=6, Number of Positions=6, Number of Rows=1, Orientation=Vertical, Packaging=Bulk, Pitch=2.54mm, RoHS=Compliant, Termination="Through Hole", Voltage Rating=250V
PWR_IN: library part CMP-2000-05888-3, "CONN HEADER VERT 2POS 2.5MM", Color=Natural, Contact Resistance=20mR, Current Rating=3A, Housing Color=White, Insulation Resistance=1GR, Max Operating Temperature=85°C, Max Voltage Rating (AC)=250V, Min Operating Temperature=-25°C, Connector Type="Male Pin", Contact Material=Brass, Contact Plating=Tin, Contact Type="Male Pin", Depth=5.75mm, Fastening Type=Detent, Housing Material=Polyamide, Lead Free="Lead Free", Lead Pitch=2.5mm, Length=7.4mm, Max Current Rating=3A, Max Voltage Rating (DC)=250V, Mount="Through Hole", Number of Contacts=2, Number of Positions=2, Number of Rows=1, Orientation=Straight, Packaging=Bulk, Pitch=2.5mm, REACH SVHC="No SVHC", Series=XH, Termination=Solder, Voltage Rating=250V, Voltage Rating (AC)=250V, Wire/Cable Gauge=22AWG
R1 R2 R3 R4 R12 R13 R14 R15 R16 R21 R22: library part CMP-2100-03664-2, "RES 10K OHM 1% 1/10W 0603", Case Code (Imperial)=0603, Case Code (Metric)=1608, Max Operating Temperature=155°C, Max Power Dissipation=100mW, Min Operating Temperature=-55°C, Resistance=10kR, Resistance Tolerance=1%, Resistor Type="Thick Film", Temperature Coefficient=100ppm/°C, Voltage Rating=75V, Voltage Rating (DC)=50V, Case/Package=0603, Construction=Rectangular, Depth=0.8mm, Features="Moisture Resistant", Height=0.45mm, Lead Free="Lead Free", Lead Pitch=0.3mm, Length=1.6mm, Military Standard=Not, Number of Pins=2, Number of Terminations=2, Packaging="Tape and Reel", Power Rating=100mW, RoHS Compliant=Yes, Series=RC, Size Code=0603, Termination=SMD/SMT, Tolerance=1%, Weight=7.1E-05oz, Width=0.8mm
R5 R6 R7 R8 R17 R18 R19 R20: library part CMP-2000-06932-2, "RES 20K OHM 1% 1/10W 0603", Case Code (Imperial)=0603, Case Code (Metric)=1608, Max Operating Temperature=155°C, Max Power Dissipation=100mW, Min Operating Temperature=-55°C, Package Quantity=1, Resistance=20kR, Resistance Tolerance=1%, Resistor Type="Thick Film", Temperature Coefficient=100ppm/°C, Voltage Rating=50V, Case/Package=0603, Construction=Rectangular, Depth=0.8mm, Features="Moisture Resistant", Height=0.022inch, Lead Free="Lead Free", Length=0.063inch, Military Standard=Not, Number of Pins=2, Number of Terminations=2, Packaging="Tape and Reel", Power Rating=100mW, REACH SVHC="No SVHC", RoHS Compliant=Yes, Series=RC, Size Code=0603, Technology="THICK FILM", Termination=SMD/SMT, Tolerance=1%, Voltage Rating (DC)=50V, Width=0.031inch
R9 R10 R25: library part CMP-03412-002877-2, "RES 470Ω 1.00% 0.1W 0603", Case/Package=0603, Resistance=470R, Tolerance=1%, RoHS Compliant=Yes
R11: library part CMP-03412-010455-1, "RES SMD 120 OHM 1% 1/10W 0603", JLCPCB=0603WAF1200T5E, Manufacturer=Yageo, Package=RT0603, Power Rating=0.1W, Resistance=120Ω, Temperature="-55°C to +155°C", Temperature Coefficient="50 ppm/°C", Temperature Range High=+155°C, Temperature Range Low=-55°C, Tolerance=0.01, Voltage Rating=75V, Automotive=No, Category=Res, ComponentLink2Description=Datasheet, ComponentLink2URL=http://www.yageo.com/documents/recent/PYu-RT_1-to-0.01_RoHS_L_9.pdf, Composition="Thin Film", Device Class L1="Passive Components", Device Class L2=Resistors, Device Class L3="Chip SMD Resistors", Digikey Description="RES SMD 120 OHM 1% 1/10W 0603", Footprint Url=http://www.yageo.com/exep/pages/download/literatures/PYu-R_Mount_10.pdf, Height=0.55mm, Ipc Land Pattern Name=RESC16080X45, Lead Free=Yes, Manufacturer Part Number=RT0603FRE07120RL, Mouser Description="High Precision-High Stability Chip Resistor Thin Film 0603 120Ohm 1% Paper T/R", Octopart=https://octopart.com/rt0603fre07120rl-yageo-40001924, RoHS=TRUE, Series=RT
R23 R24: library part CMP-1011-00510-4, "Chip Resistor, 1 KOhm, +/- 1%, 100 mW, -55 to 155 degC, 0402 (1005 Metric), RoHS, Tape and Reel", Case Code (Imperial)=0402, Case Code (Metric)=1005, Manufacturer="Basic Passives", Max Operating Temperature="155 degC", Min Operating Temperature="-55 degC", Package Quantity=10000, PartNumber=ERJ-2RKF1001X, Power Rating="100 mW", Resistance="1 KOhm", Tolerance=1%, Voltage Rating="50 V", Case\/Package=0402, ComponentLink1Description="Manufacturer URL", ComponentLink1URL=http://www.panasonic.com/, ComponentLink2Description=Datasheet, ComponentLink2URL=http://industrial.panasonic.com/cdbs/www-data/pdf/RDA0000/AOA0000C86.pdf, DatasheetVersion=04/2015, Height="0.35 mm", Length="1 mm", Mount="Surface Mount", Mounting Technology="Surface Mount", PackageDescription="2-Pin Surface Mount Device, Body 1 x 0.5 mm", PackageReference=0402, Packaging="Tape and Reel", Pins=2, Radiation Hardening=No, REACH SVHC=Yes, RoHSCompliant=true, Width="0.5 mm"
RST_BTN: library part CMP-26321-000004-1, "LSH 6X6 SHORT TRAVEL SWITCH 7.00", Case/Package=SMD/SMT, Max Current Rating=50mA, Max Operating Temperature=70°C, Max Voltage Rating (DC)=12V, Min Operating Temperature=-20°C, Operating Force=1.6N, Depth=10mm, Length=6mm, Mechanical Life=100000Cycles, Mount="Surface Mount", Orientation=Straight, Packaging="Tape and Reel", Radiation Hardening=No, RoHS Compliant=Yes, Termination="Gull Wing", Throw Configuration=SPST, Voltage Rating (DC)=12V
STLink: library part CMP-1502-01068-4, "THT Vertical Pin Header WR-PHD, Pitch 2.54 mm, Single Row, 5 pins", Color=Black, Contact Resistance=20mΩ, Current Rating=3A, Max Operating Temperature=105°C, Min Operating Temperature=-40°C, Operating Supply Voltage=250V, Connector Type="Male Pin", Contact Material=Gold, Contact Mating Length=5.9944mm, Contact Plating=Gold, Gender=Male, Height=8.89mm, Lead Free="Lead Free", Lead Pitch=2.54mm, Mount="Through Hole", Number of Contacts=5, Number of Pins=5, Number of Positions=5, Number of Rows=1, Orientation=Vertical, Packaging=Bulk, Pitch=2.54mm, RoHS=Compliant, Termination=Solder, Voltage Rating=250V
U1: library part CMP-0136-00791-1, "Low Quiescent Current LDO, 3-Pin SOT-23, Extended Temperature, Tape and Reel", Code_IPC=SOT23-3, DatasheetVersion="revB, Feb-2007", PackageDescription="3-Lead Plastic Small Outline Transistor (TT) [SOT-23]", PackageReference=SOT-23-TT3, PackageVersion="revBB, Aug-2009"
U2: library part CMP-0315-00033-3, "IC TRANSCEIVER HALF 1/1 8SOIC", Case/Package=D, Max Operating Temperature=125°C, Max Supply Current=17mA, Max Supply Voltage=3.6V, Min Operating Temperature=-40°C, Min Supply Voltage=3V, Operating Supply Voltage=3.3V, Package Quantity=2500, Contact Plating=Gold, Data Rate=1Mbps, Lead Free="Lead Free", Nominal Supply Current=17mA, Number of Drivers=1, Number of Pins=8, Number of Receivers=1, Number of Transceivers=1, Packaging="Tape and Reel", Radiation Hardening=No, Receiver Hysteresis=100mV, RoHS Compliant=Yes, Simplex/Duplex="Half Duplex", Weight=0.002822oz
U3: library part CMP-0534-00027-1, "Dual Channel Digital Isolator, 2.5 KV rms Insulation Rating, 10 Mbps Data Rate, 50 ns Delay, Industrial, 8-pin SOIC (R-8), Reel", Insulation Rating (kVrms)=2.5, Manufacturer="Analog Devices", Max Operating Temp (degreesC)=125, Code_JEDEC=MS-012-AA, ComponentLink1Description="Manufacturer URL", ComponentLink1URL=http://www.analog.com/en/index.html, ComponentLink2Description=Datasheet, ComponentLink2URL=http://www.analog.com/static/imported-files/data_sheets/ADuM1200_1201.pdf, ComponentLink3Description="Package Specification", ComponentLink3URL=http://www.analog.com/static/imported-files/packages/PKG_PDF/SOIC_Narrow%20(R)/R_8.pdf, ComponentLink4Description="URL Link1", ComponentLink4URL="Product URL:http://www.analog.com/en/interface-isolation/digital-isolators/adum1201/products/product.html", ComponentLink5Description="URL Link2", ComponentLink5URL="Reference Circuit:http://www.analog.com/en/interface-isolation/digital-isolators/adum1201/products/product.html#product-recommendations", DatasheetVersion="Rev. I", Max Data Rate=10Mbps, Mounting Technology="Surface Mount", PackageDescription="8-Pin Standard Small Outline Package, Body 4.9 x 3.9 mm, Pitch 1.27 mm", PackageReference=R-8, PackageVersion="060506-A, 06/2006", PartNumber=ADUM1201BRZ-RL7
U4: library part CMP-12105-000007-1, "IC MCU 32BIT 512KB FLASH 64LQFP", Ambient Temperature Range High=+85°C, Ambient Temperature Range Low=-40°C, Frequency=180MHz, Manufacturer=ST, Max Junction Temp=+105°C, Max Supply Voltage=3.6V, Min Supply Voltage=1.7V, Package=LQFP64-5W, Temperature="-40°C to +105°C", Automotive=No, Category=IC, ComponentLink2Description=Datasheet, ComponentLink2URL=https://www.st.com/en/microcontrollers-microprocessors/stm32f446re.html, Core Architecture="ARM Cortex-M4", Data Bus Width=32bits, Device Class L1="Integrated Circuits (ICs)", Device Class L2="Embedded Processors and Controllers", Device Class L3=Microcontrollers, Digikey Description="IC MCU 32BIT 512KB FLASH 64LQFP", Height=1.6mm, Interface=I2C,SPI,UART,USART,CAN,USB,LIN,IrDA,I2S,Other, Ipc Land Pattern Name=QFP50P1200X1200X160-64, Lead Free=Yes, Manufacturer Part Number=STM32F446RET6, Memory Size=512KBytes, Memory Type=FLASH, Mouser Description="ARM Microcontrollers - MCU High-performance and DSP with FP, ARM Cortex-M4 MCU with 512 Kbytes Flash, 180 MHz CPU, Art Accelerator, SDRAM", Number Of A/D Converters=3, Number Of Adc Channels=16, Number Of Cores=1, Number Of I2C Channels=4, Number Of I/Os=50, Number Of Pwm Channels=32, Number Of Spi Channels=4, Number Of Timers/Counters=14, Number Of Uart Channels=6, Number Of Usb Channels=2, Octopart=https://octopart.com/stm32f446ret6-stmicroelectronics-52642920, Ram Size=128KBytes, RoHS=TRUE, Standoff Height=0.05mm, Temperature Range High=+105°C, Temperature Range Low=-40°C
Y1: library part CMP-2000-05033-2, "Crystal 8MHz ±20ppm 18pF SMD-2 5mm x 3.2mm", Case/Package=CSMD, ESR (Equivalent Series Resistance)=140R, Frequency=8MHz, Frequency Stability=30ppm, Frequency Tolerance=20ppm, Load Capacitance=18pF, Max Operating Temperature=85°C, Min Operating Temperature=-40°C, Package Quantity=1000, Resistor Type=Ceramic, Series Resistance=500R, Depth=3.2mm, Height=0.051inch, Lead Free="Lead Free", Length=5mm, Mount="Surface Mount", Number of Pins=2, Packaging="Tape and Reel", Radiation Hardening=No, RoHS Compliant=Yes, Termination=SMD/SMT, Tolerance=20ppm, Width=3.2mm

## Free pads (board coordinates)
  round 3.2 hole 3.2 unplated: H1(2.311,90.348) H2(62.382,89.992) H3(2.565,2.515) H4(62.382,3.353)

## Via types
v1: diameter 0.6, hole 0.3, Top Layer to Bottom Layer, tented both sides, 73 vias

## Nets (pads, with @x,y where several pads share a name; then routed paths per layer and width w, separated by ;. In a path a pad name is that pad's centre, name@x,y a point inside that pad or via, vN(x,y) a via of type N, cw(c..) or ccw(c..) an arc to the next point about the centre after c; other vN are vias at no path point)
CAN-3V3: C5.1 C6.1 J3.4 J4.4 R9.2 R10.2 U2.3 U3.8 | length 65.6
  Top Layer w0.381: 7.62,59.538 7.671,59.487 7.747,59.411 R10.2@8.826,59.411 ; 7.671,57.048 R9.2@8.781,57.048
  Top Layer w0.635: 6.756,63.652 6.883,63.525 ; 6.756,64.262 6.772,64.246 17.17,64.246 21.149,64.246 22.225,63.17 U2.3 ; 7.671,59.487 7.671,57.048 7.62,56.998 7.62,55.651 8.671,54.6 17.043,54.6 17.118,54.6 17.992,55.474 19.591,55.474 19.609,55.456 U3.8
  Top Layer w0.889: 7.62,59.538 6.756,60.401 6.756,63.652 6.756,64.262 6.756,69.545 8.611,71.399 J3.4 17.778,71.405 17.778,77.947 J4.4
CAN_RX: U3.2 U4.33 | length 8.6
  Top Layer w0.305: 23.089,46.101 24.028,46.101 24.721,45.408 25.566,45.408 U4.33
  Top Layer w0.635: U3.2 20.879,47.473 22.25,46.101 23.089,46.101
CAN_TX: U3.3 U4.34 | length 8.5
  Top Layer w0.305: v1(23.19,44.882) 23.214,44.906 24.105,44.906 U4.34
  Top Layer w0.635: U3.3 22.149,48.641 v1(22.733,48.057)
  Bottom Layer w0.635: v1(22.733,48.057) 22.733,45.511 23.19,45.054 v1(23.19,44.882)
ENC1_A: R1.2 R5.1 U4.22 | length 35.5
  Top Layer w0.305: 31.534,53.594 31.534,51.24 32.512,50.262 32.512,49.919 32.568,49.862 U4.22
  Top Layer w0.635: 31.534,53.594 31.534,66.053 36.761,71.28 36.761,71.995 39.869,75.103 R1.2 R5.1
ENC1_B: R2.2 R6.1 U4.23 | length 33.1
  Top Layer w0.305: 30.709,52.248 30.709,50.731 31.521,49.919 31.521,49.726 32.068,49.178 U4.23
  Top Layer w0.508: 30.709,52.248 30.709,66.675 33.367,69.333 R6.1
  Top Layer w0.635: R6.1 34.744,77.419 34.756,77.431 R2.2
ENC2_A: R3.2 R7.1 U4.58 | length 21
  Top Layer w0.305: 31.445,33.045 31.445,33.407 32.068,34.03 U4.58
  Top Layer w0.889: R3.2 R7.1 25.968,19.567 30.709,24.308 30.709,31.242 31.445,31.979 31.445,33.045
ENC2_B: R4.2 R8.1 U4.59 | length 18.5
  Top Layer w0.305: U4.59 32.568,33.841 32.588,33.821 32.588,33.045
  Top Layer w0.889: R4.2 30.852,19.101 R8.1 32.588,19.168 32.588,33.045
GND: BLTN_LED.1 C1.2 C2.2 C3.2 C4.2 C5.2 C6.2 C7.2 C8.2 C9.1 C10.2 C11.1 C12.2 C13.1 C14.2 C15.2 ENC1.4 ENC2.4 IMU.02 IMU.07 J3.1 J4.1 MTR_ENC_1.3 MTR_ENC_2.3 P6.6 P6.7 P7.4 PWR_IN.2 R5.2 R6.2 R7.2 R8.2 R12.2 R17.2 R18.2 R19.2 R20.2 R22.2 RST_BTN.1 STLink.5 U1.1 U2.2 U3.4 U3.5 U4.12 U4.18 U4.31 U4.47 U4.63 | length 94.1
  Top Layer w0.305: BLTN_LED.1 6.198,45.33 v1(6.198,43.891) ; v1(16.561,39.395) 16.561,39.754 17.142,40.335 C10.2 ; C9.1 17.808,44.066 18.447,44.704 v1(19.075,44.704) ; C12.2@21.093,34.823 21.166,34.823 21.52,34.47 21.52,33.818 22.035,33.302 v1(22.035,33.262) ; U4.47 25.571,38.408 26.105,38.408 26.148,38.451 26.36,38.451 v1(26.959,39.05) ; C11.1 25.984,53.381 26.264,53.66 v1(26.264,53.696) ; v1(27.94,48.844) 27.94,48.764 28.068,48.636 U4.31@28.068,47.854 ; C15.2 28.169,53.278 28.448,53.557 v1(28.448,53.637) ; v1(33.579,37.389) 33.766,37.389 34.566,36.589 34.566,35.908 U4.63 ; U4.18 34.571,47.408 34.571,48.089 34.792,48.311 36.073,48.311 36.784,47.6 v1(36.906,47.6) ; v1(34.925,44.221) 35.316,44.221 36.131,43.406 U4.12 ; v1(39.433,46.203) 39.452,46.222 39.452,47.109 C14.2@39.497,47.154 ; C13.1 39.93,33.668 40.932,33.668 v1(40.945,33.68)
  Top Layer w0.457: C3.2 42.6,47.448 42.603,47.448 43.064,47.909 43.592,47.909 v1(43.748,48.064)
  Top Layer w0.508: C8.2 44.18,45.228 44.907,44.501 44.907,40.234 ; C7.2 44.104,35.138 44.907,35.941 44.907,40.234 ; v1(45.695,40.234) 44.907,40.234
  Top Layer w0.635: R12.2 12.7,67.539 v1(11.532,66.37) 11.703,66.37 12.627,65.446 C6.2@17.17,65.446 ; v1(16.967,50.216) 17.089,50.094 17.089,49.696 18.425,48.36 C4.2@18.425,48.285 ; C5.2@17.176,53.168 17.351,53.168 17.636,52.883 v1(23.343,52.883) ; v1(17.856,62.586) 17.86,62.586 18.546,63.271 20.498,63.271 20.909,62.861 20.909,61.69 U2.2 ; U3.4 23.419,52.807 v1(23.343,52.883) ; U3.5 23.419,52.959 v1(23.343,52.883) ; v1(27,17.323) 27,17.495 27.309,17.804 27.309,19.038 R7.2 ; v1(30.226,77.368) 30.251,77.394 32.001,77.394 32.013,77.406 R6.2 ; v1@33.274,54.28 v1(33.284,54.29) U1.1 ; R8.2 33.875,19.024 33.886,19.012 33.963,19.012 33.982,18.994 35.311,18.994 v1(35.433,18.872) ; C2.2 37.623,50.622 38.004,51.003 v1(38.176,51.003) ; R22.2@36.858,29.68 36.858,29.769 v1(38.049,29.769) ; v1(38.151,25.248) 38.272,25.126 39.016,25.126 39.573,24.569 R19.2 ; C1.2 v1(41.021,55.651) ; v1(39.522,10.185) 39.522,10.357 40.441,11.276 40.441,11.901 R18.2 ; v1(42.189,75.362) 42.189,75.376 42.841,76.027 R5.2 ; MTR_ENC_1.3 44.285,7.071 44.285,5.042 v1(44.298,5.029) ; R20.2 49.945,25.527 v1(50.978,25.527) ; R17.2 50.516,11.571 50.516,9.504 v1(50.546,9.474)
  Top Layer w1.27: v1(46.253,61.519) 47.315,61.519 48.295,62.499 RST_BTN.1 ; MTR_ENC_2.3 46.369,21.426 46.369,24.119 v1(46.38,24.13)
I2C1_SCL: IMU.03 U4.61 | length 22.9
  Top Layer w0.305: U4.61 33.568,34.326 35.077,32.817 36.22,31.674
  Top Layer w0.635: 36.22,31.674 36.805,31.09 46.821,31.09 47.777,32.046 47.777,35.306 48.185,35.713 49.429,35.713 IMU.03
I2C1_SDA: IMU.04 U4.62 | length 23.1
  Top Layer w0.305: U4.62 34.071,35.904 34.071,35.195 36.347,32.918
  Top Layer w0.635: 36.347,32.918 37.287,31.979 46.186,31.979 46.558,32.351 46.558,37.262 47.727,38.43 IMU.04
IMU_INT: IMU.08 U4.26 | length 21.8
  Top Layer w0.305: v1(30.023,48.692) 30.566,48.149 U4.26@30.566,47.854
  Top Layer w0.635: v1(43.713,49.886) 43.739,49.86 45.943,49.86 47.213,48.59 IMU.08
  Bottom Layer w0.508: v1(30.023,48.692) 30.023,48.717 30.527,49.221 30.527,49.425 30.886,49.784 41.89,49.784 41.992,49.886 v1(43.713,49.886)
M1CS: C9.2 R23.1 U4.8 | length 48.7
  Top Layer w0.305: v1(33.63,42.088) 34.311,41.406 U4.8
  Top Layer w0.508: R23.1 13.143,41.769 14.554,43.18 17.726,43.18 C9.2 18.894,43.26 v1(19.812,42.342)
  Bottom Layer w0.508: v1(19.812,42.342) 19.83,42.324 20.389,42.324 20.747,41.966 24.003,41.966 27.422,41.966 27.544,42.088 v1(33.63,42.088)
M1DIR: P9.1 U4.10 | length 49.6
  Top Layer w0.305: U4.10 37.071,42.408 38.042,42.408 40.698,45.064 40.698,46.139 41.504,46.945 41.504,48.7 43.668,50.863 43.752,50.863
  Top Layer w0.635: 43.752,50.863 48.34,50.863 48.425,50.779 50.161,50.779 50.246,50.863 51.317,50.863 51.689,50.492 51.689,49.708 55.359,46.038 55.359,26.327 P9.1
M1FLT: P9.2 U4.56 | length 51.5
  Top Layer w0.305: 29.718,33.096 29.718,33.228 29.739,33.249 31.068,34.578 U4.56
  Top Layer w0.508: 29.718,32.525 29.718,33.096
  Top Layer w0.635: v1(23.292,23.495) 23.292,25.54 29.134,31.382 29.134,31.941 29.718,32.525
  Bottom Layer w0.635: v1(23.292,23.495) 25.756,21.031 P9.2
M1PWM: P7.9 U4.41 | length 50.4
  Top Layer w0.305: U4.41 28.393,41.406 v1(29.337,40.462)
  Bottom Layer w0.635: v1(29.337,40.462) 29.337,40.179 29.98,39.537 29.98,36.666 28.238,34.925 27.305,33.992 27.305,28.093 28.347,27.051 54.991,27.051 P7.9
M1SLP: P9.6 U4.24 | length 85.7
  Top Layer w0.305: v1(29.901,55.965) 30.048,51.974 30.15,50.499 30.447,50.097 30.625,49.918 30.937,49.606 30.937,49.454 31.14,49.251 31.568,48.823 U4.24
  Top Layer w0.635: v1(52.984,42.824) 52.946,42.786 52.946,41.055 52.984,41.017 52.984,16.002 P9.6
  Bottom Layer w0.635: v1(29.901,55.965) 29.783,56.082 29.783,57.571 35.12,62.908 35.699,62.908 36.588,63.797 41.394,63.797 42.591,63.797 44.158,62.23 44.158,61.032 44.158,60.651 48.133,56.676 48.455,56.676 51.388,53.742 51.388,52.545 52.984,50.949 v1(52.984,42.824)
M2CS: C10.1 R24.1 U4.9 | length 49.6
  Top Layer w0.305: v1(33.376,43.282) 35.609,43.282 35.798,43.093 35.798,42.495 36.385,41.908 37.066,41.908 U4.9
  Top Layer w0.508: R24.1 15.138,17.718 15.138,40.665 15.69,41.217 17.069,41.217 C10.1 17.177,41.173 19.812,41.173 21.064,42.426 21.064,42.756 v1(21.082,42.774)
  Bottom Layer w0.508: v1(21.082,42.774) 24.003,42.774 32.843,42.774 33.351,43.282 v1(33.376,43.282)
M2DIR: P7.10 U4.11 | length 47.2
  Top Layer w0.305: U4.11 37.071,42.908 37.752,42.908 39.522,44.679 40.139,45.296 40.139,46.371 40.945,47.176 40.945,49.314 43.51,51.88
  Top Layer w0.635: 43.51,51.88 48.581,51.88 48.793,51.668 49.793,51.668 49.877,51.752 51.803,51.752 56.248,47.308 56.248,29.502 P7.10
M2FLT: P7.6 U4.57 | length 44.2
  Top Layer w0.305: v1@29.362,28.889 29.362,30.312 29.858,30.807 29.858,31.594 30.594,32.331 30.594,32.791 30.594,33.337 31.568,34.311 U4.57
  Bottom Layer w0.635: v1(29.362,28.88) 29.413,28.829 49.993,28.829 51.714,30.55 51.714,36.957 52.553,37.795 P7.6
M2PWM: P7.8 U4.42 | length 50.6
  Top Layer w0.305: U4.42 27.863,40.906 28.911,39.857 29.588,39.857 29.907,40.177 30.551,40.177 v1(30.607,40.234)
  Bottom Layer w0.635: v1(30.607,40.234) 30.767,40.073 30.767,36.197 29.496,34.925 28.194,33.623 28.194,28.461 28.715,27.94 53.34,27.94 P7.8
M2SLP: P9.4 U4.25 | length 83.8
  Top Layer w0.305: v1(28.727,57.201) 28.738,57.17 29.165,55.671 29.35,50.257 29.688,49.919 31.068,48.538 U4.25
  Top Layer w0.635: v1(54.153,41.554) 54.153,19.914 P9.4
  Bottom Layer w0.635: v1(28.727,57.201) 28.651,57.277 28.651,58.191 34.257,63.797 35.33,63.797 36.219,64.686 41.762,64.686 42.959,64.686 45.047,62.598 45.047,61.401 45.047,61.019 48.501,57.565 48.823,57.565 52.277,54.11 52.277,52.913 54.191,50.999 54.191,41.593 v1(54.153,41.554)
MTR_ENC_1_A: R13.2 R17.1 U4.21 | length 78.7
  Top Layer w0.305: v1(32.456,56.413) 32.456,54.236 32.309,54.089 32.309,52.019 33.071,51.257 33.071,47.854 33.068,47.851 U4.21
  Top Layer w0.635: v1(51.778,44.183) 51.778,28.757 51.867,28.667 51.867,21.419 51.832,21.384 R13.2 51.832,12.688 51.846,12.674 51.846,11.671 51.858,11.659 R17.1
  Bottom Layer w0.635: v1(32.456,56.413) 32.443,56.426 32.443,57.491 32.309,57.626 32.309,58.261 36.956,62.908 42.223,62.908 43.269,61.862 43.269,60.283 47.765,55.787 48.087,55.787 50.499,53.374 50.499,52.176 51.778,50.898 v1(51.778,44.183)
MTR_ENC_1_B: R14.2 R18.1 U4.55 | length 45.5
  Top Layer w0.305: 28.702,33.045 30.568,34.912 U4.55
  Top Layer w0.635: 28.702,33.045 28.245,32.588 28.245,31.75 22.031,25.536 22.031,14.848 24.282,12.597 33.246,12.597 34.822,14.173 R14.2 39.125,12.015 39.1,11.989 R18.1
MTR_ENC_2_A: R15.2 R19.1 U4.14 | length 31.1
  Top Layer w0.305: v1(35.23,45.466) 36.287,44.408 37.066,44.408 U4.14
  Top Layer w0.889: R15.2 R19.1 40.019,23.216 42.012,25.208 v1(42.012,30.074)
  Bottom Layer w0.889: v1(35.23,45.466) 37.998,42.697 37.998,33.045 38.227,32.817 40.056,30.988 41.372,30.988 42.012,30.348 v1(42.012,30.074)
MTR_ENC_2_B: R16.2 R20.1 U4.15 | length 31.8
  Top Layer w0.305: U4.15@37.516,44.908 37.816,44.908 38.288,45.38 v1(38.367,45.38)
  Top Layer w0.889: v1(43.958,30.074) 44.167,29.864 44.167,27.029 45.542,25.654 47.879,25.654 49.369,24.164 R20.1 49.86,24.088 R16.2
  Bottom Layer w0.889: v1(38.367,45.38) 39.091,44.656 39.167,44.58 39.167,33.655 40.691,32.131 42.367,32.131 43.053,31.445 43.053,31.301 43.696,30.658 43.696,30.335 v1(43.958,30.074)
NetBLTN_LED_2: BLTN_LED.2 R25.1 | length 2.5
  Top Layer w0.305: BLTN_LED.2 8.238,45.441 R25.1
NetC15_1: C15.1 U4.30 | length 4
  Top Layer w0.305: C15.1 28.143,51.156 28.143,49.759 28.568,49.334 U4.30
NetD1_1: D1.1 U2.4 U3.7 | length 13.5
  Top Layer w0.635: D1.1 20.741,57.023 20.879,57.161 ; U3.7 20.879,57.161 ; U2.4 23.449,61.597 23.449,60.201 20.88,57.633 20.88,57.162 20.879,57.161
NetD1_2: D1.2 R9.1 | length 2.5
  Top Layer w0.381: R9.1@10.281,57.048 12.784,57.048 D1.2
NetD2_1: D2.1 U2.1 U3.6 | length 13
  Top Layer w0.635: D2.1 19.335,59.36 19.589,59.106 v1(19.761,59.106) 19.761,60.693 19.731,60.723 19.731,61.597 U2.1 ; U3.6 v1(22.149,57.125)
  Bottom Layer w0.635: v1(19.761,59.106) 19.883,58.984 20.746,58.984 21.129,58.601 21.129,58.316 22.149,57.296 v1(22.149,57.125)
NetD2_2: D2.2 R10.1 | length 2.4
  Top Layer w0.381: R10.1@10.326,59.411 12.691,59.411 D2.2
NetENC1_2: ENC1.2 R2.1 | length 6.6
  Top Layer w0.635: ENC1.2 36.098,83.98 36.098,77.456 R2.1
NetENC1_3: ENC1.3 R1.1 | length 6.7
  Top Layer w0.635: R1.1 38.515,77.445 38.563,77.492 ENC1.3
NetENC2_2: ENC2.2 R4.1 | length 5.3
  Top Layer w0.889: R4.1 29.473,16.709 29.809,16.373 ENC2.2
NetENC2_3: ENC2.3 R3.1 | length 6.9
  Top Layer w0.889: R3.1 23.047,18.13 ENC2.3
NetJ3_2: J3.2 J4.2 P1.2 U2.6 | length 29.9
  Top Layer w0.889: P1.2 8.28,82.004 8.801,82.525 15.494,82.525 15.519,82.55 18.186,82.55 J4.2 22.778,77.947 22.778,71.405 J3.2 22.773,71.261 22.225,70.713 U2.6
NetJ3_3: J3.3 J4.3 R11.1 U2.7 | length 23.7
  Top Layer w0.889: R11.1 11.035,75.223 15.365,79.553 18.684,79.553 J4.3 20.278,77.947 20.278,71.405 J3.3 20.273,71.261 20.955,70.579 U2.7
NetMTR_ENC_1_6: MTR_ENC_1.6 R14.1 | length 7.3
  Top Layer w0.635: R14.1 44.229,14.173 45.49,12.912 45.49,11.206 MTR_ENC_1.6
NetMTR_ENC_1_8: MTR_ENC_1.8 R13.1 | length 6.3
  Top Layer w0.635: MTR_ENC_1.8 46.76,11.206 46.76,13.057 47.209,13.506 48.217,13.506 48.947,14.236 50.289,14.236 50.39,14.135 50.467,14.135 50.479,14.123 R13.1
NetMTR_ENC_2_6: MTR_ENC_2.6 R16.1 | length 12.5
  Top Layer w0.889: MTR_ENC_2.6 45.185,17.271 45.185,15.788 45.721,15.252 49.008,15.252 49.352,15.596 49.86,15.596 50.749,16.485 50.749,19.863 R16.1
NetMTR_ENC_2_8: MTR_ENC_2.8 R15.1 | length 9.5
  Top Layer w0.889: R15.1 39.649,17.513 41.911,15.252 43.23,15.252 43.766,15.788 43.766,17.271 MTR_ENC_2.8
NetP1_1: P1.1 R11.2 | length 3.4
  Top Layer w0.889: P1.1 8.28,76.239 8.801,75.718 8.84,75.718 9.335,75.223 R11.2
NetP8_1: P8.1 R23.2 | length 2.4
  Top Layer w0.635: P8.1 R23.2
NetP8_2: P8.2 R24.2 | length 2.6
  Top Layer w0.635: P8.2 R24.2
NetR12_1: R12.1 U2.8 | length 4.8
  Top Layer w0.889: R12.1 18.734,67.539 19.685,66.587 U2.8
NetR22_1: R22.1 U4.60 | length 7.9
  Top Layer w0.305: U4.60 33.068,34.115 33.452,33.731 33.452,33.38 33.743,33.089 33.743,33.045
  Top Layer w0.635: 33.743,33.045 33.743,31.754 33.794,31.704 33.794,30.141 34.166,29.769 R22.1
NetR25_2: R25.2 U4.40 | length 14.6
  Top Layer w0.305: R25.2 21.234,45.441 24.003,42.672 24.769,41.906 U4.40
NRST: C3.1 R21.1 RST_BTN.3 STLink.4 U4.7 | length 51.2
  Top Layer w0.305: 36.057,40.784 36.179,40.906 U4.7 37.782,40.906 38.574,41.699 38.76,41.885 39.066,41.94 39.192,42.066
  Top Layer w0.635: v1(28.143,37.262) 30.785,37.262 31.267,37.744 31.453,37.93 32.385,38.862 34.135,38.862 36.057,40.784 ; 39.192,42.066 39.208,42.081 41.194,44.165 41.204,44.176 41.422,44.394 41.422,44.765 41.422,45.84 42.22,46.638 45.755,46.638 46.316,47.199 47.072,47.199 v1(47.193,47.32)
  Top Layer w0.889: R21.1 47.948,57.302 RST_BTN.3 48.995,57.999 49.25,57.743 49.25,57.393 49.378,57.266 49.378,55.287 49.293,55.203 v1(49.293,52.874)
  Bottom Layer w0.635: 18.898,30.655 21.841,30.655 24.003,32.817 28.143,36.957 v1(28.143,37.262)
  Bottom Layer w0.889: v1(47.193,47.32) 47.193,47.423 48.128,48.358 48.128,49.203 49.386,50.461 49.386,51.198 49.366,51.218 49.366,52.801 v1(49.293,52.874)
OSC1: C7.1 U4.5 Y1.1 | length 7.9
  Top Layer w0.305: U4.5 38.402,39.906 38.964,39.345
  Top Layer w0.508: 38.964,39.345 40.056,39.345 40.996,38.405 42.044,38.405 Y1.1 42.52,37.93 C7.1
OSC2: C8.1 U4.6 Y1.2 | length 8.1
  Top Layer w0.305: U4.6 38.323,40.406 38.964,41.046
  Top Layer w0.508: 38.964,41.046 40.107,41.046 40.894,41.834 42.222,41.834 Y1.2 42.443,42.106 C8.1
SWCLK: STLink.3 U4.49 | length 11.3
  Top Layer w0.305: U4.49 27.571,35.904 27.571,34.849 27.584,34.835 27.584,34.366
  Top Layer w0.508: STLink.3@18.898,33.071 18.948,33.02 20.764,33.02 21.369,32.415 25.633,32.415 27.584,34.366
SWDIO: STLink.2 U4.46 | length 8.8
  Top Layer w0.305: 24.003,38.049 24.815,38.861 25.286,38.861 25.331,38.906 U4.46
  Top Layer w0.635: STLink.2@18.136,35.56 18.498,35.56 18.93,35.992 21.946,35.992 24.003,38.049
VCC-3V3: C2.1 C4.1 C11.2 C12.1 C13.2 C14.1 IMU.01 R21.2 STLink.1 U1.2 U3.1 U4.1 U4.13 U4.19 U4.32 U4.48 U4.64 | length 149.6